# EAGLE board piskac_pan (EAGLE 7.2.0)
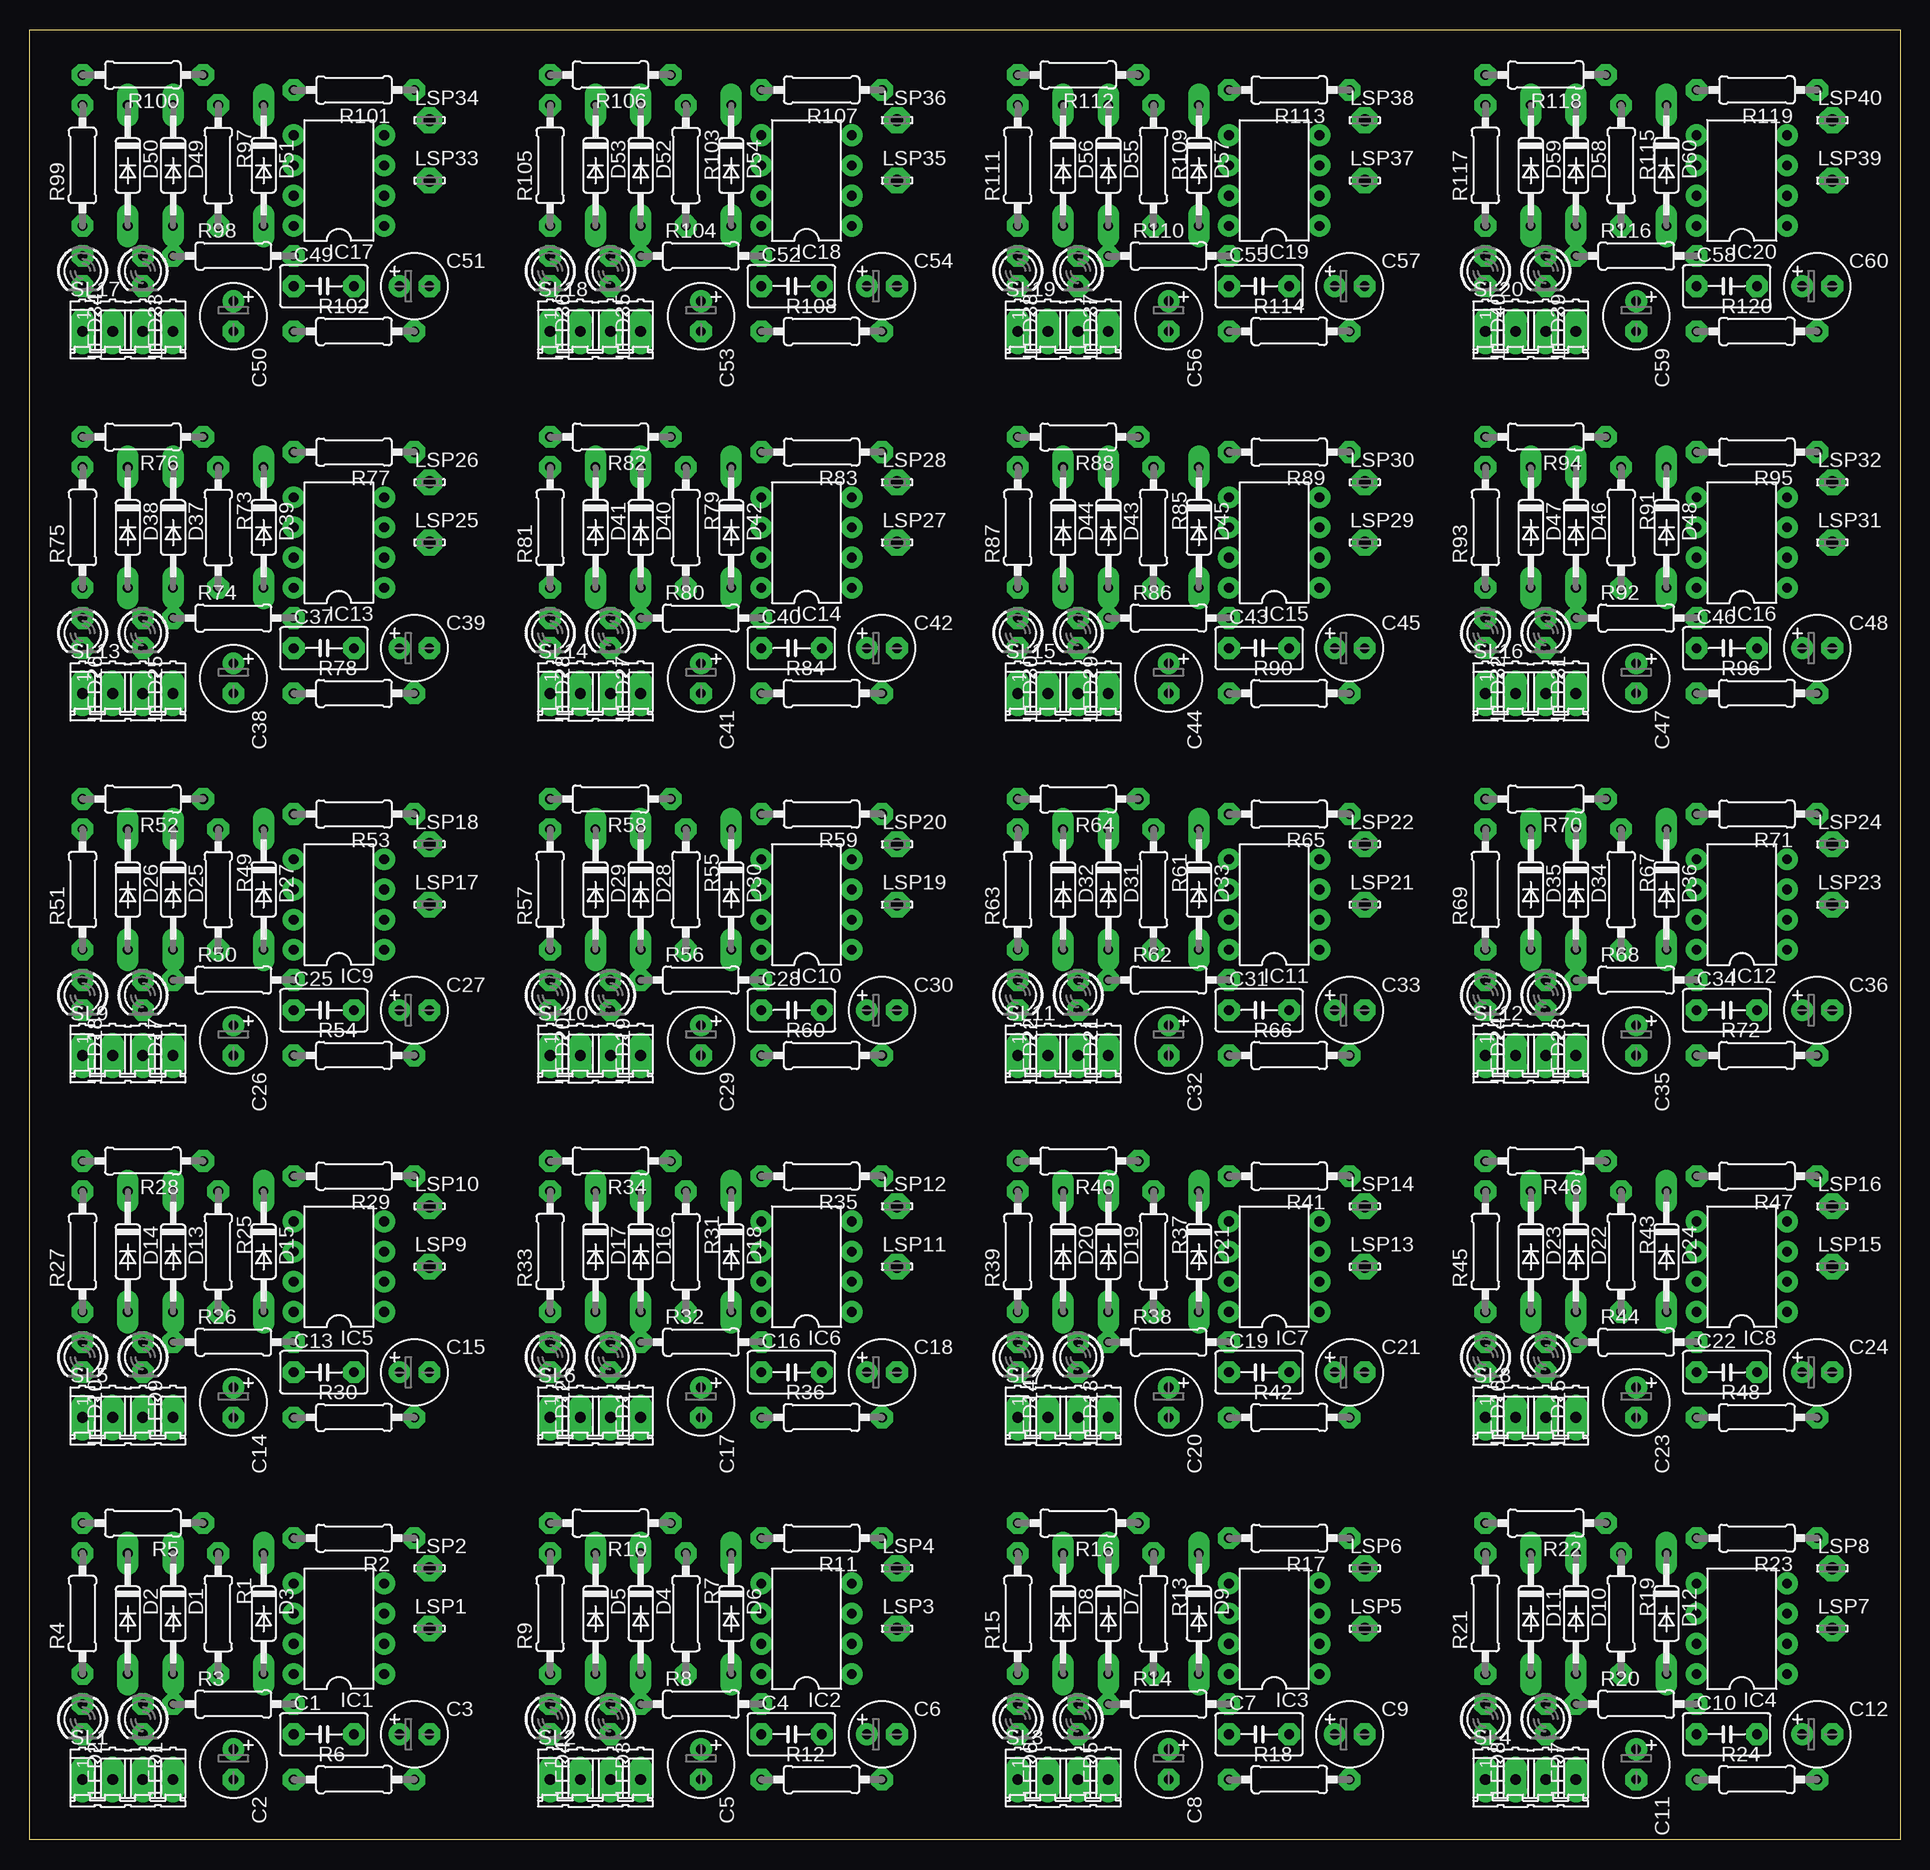
[diagram p0: board, top side]
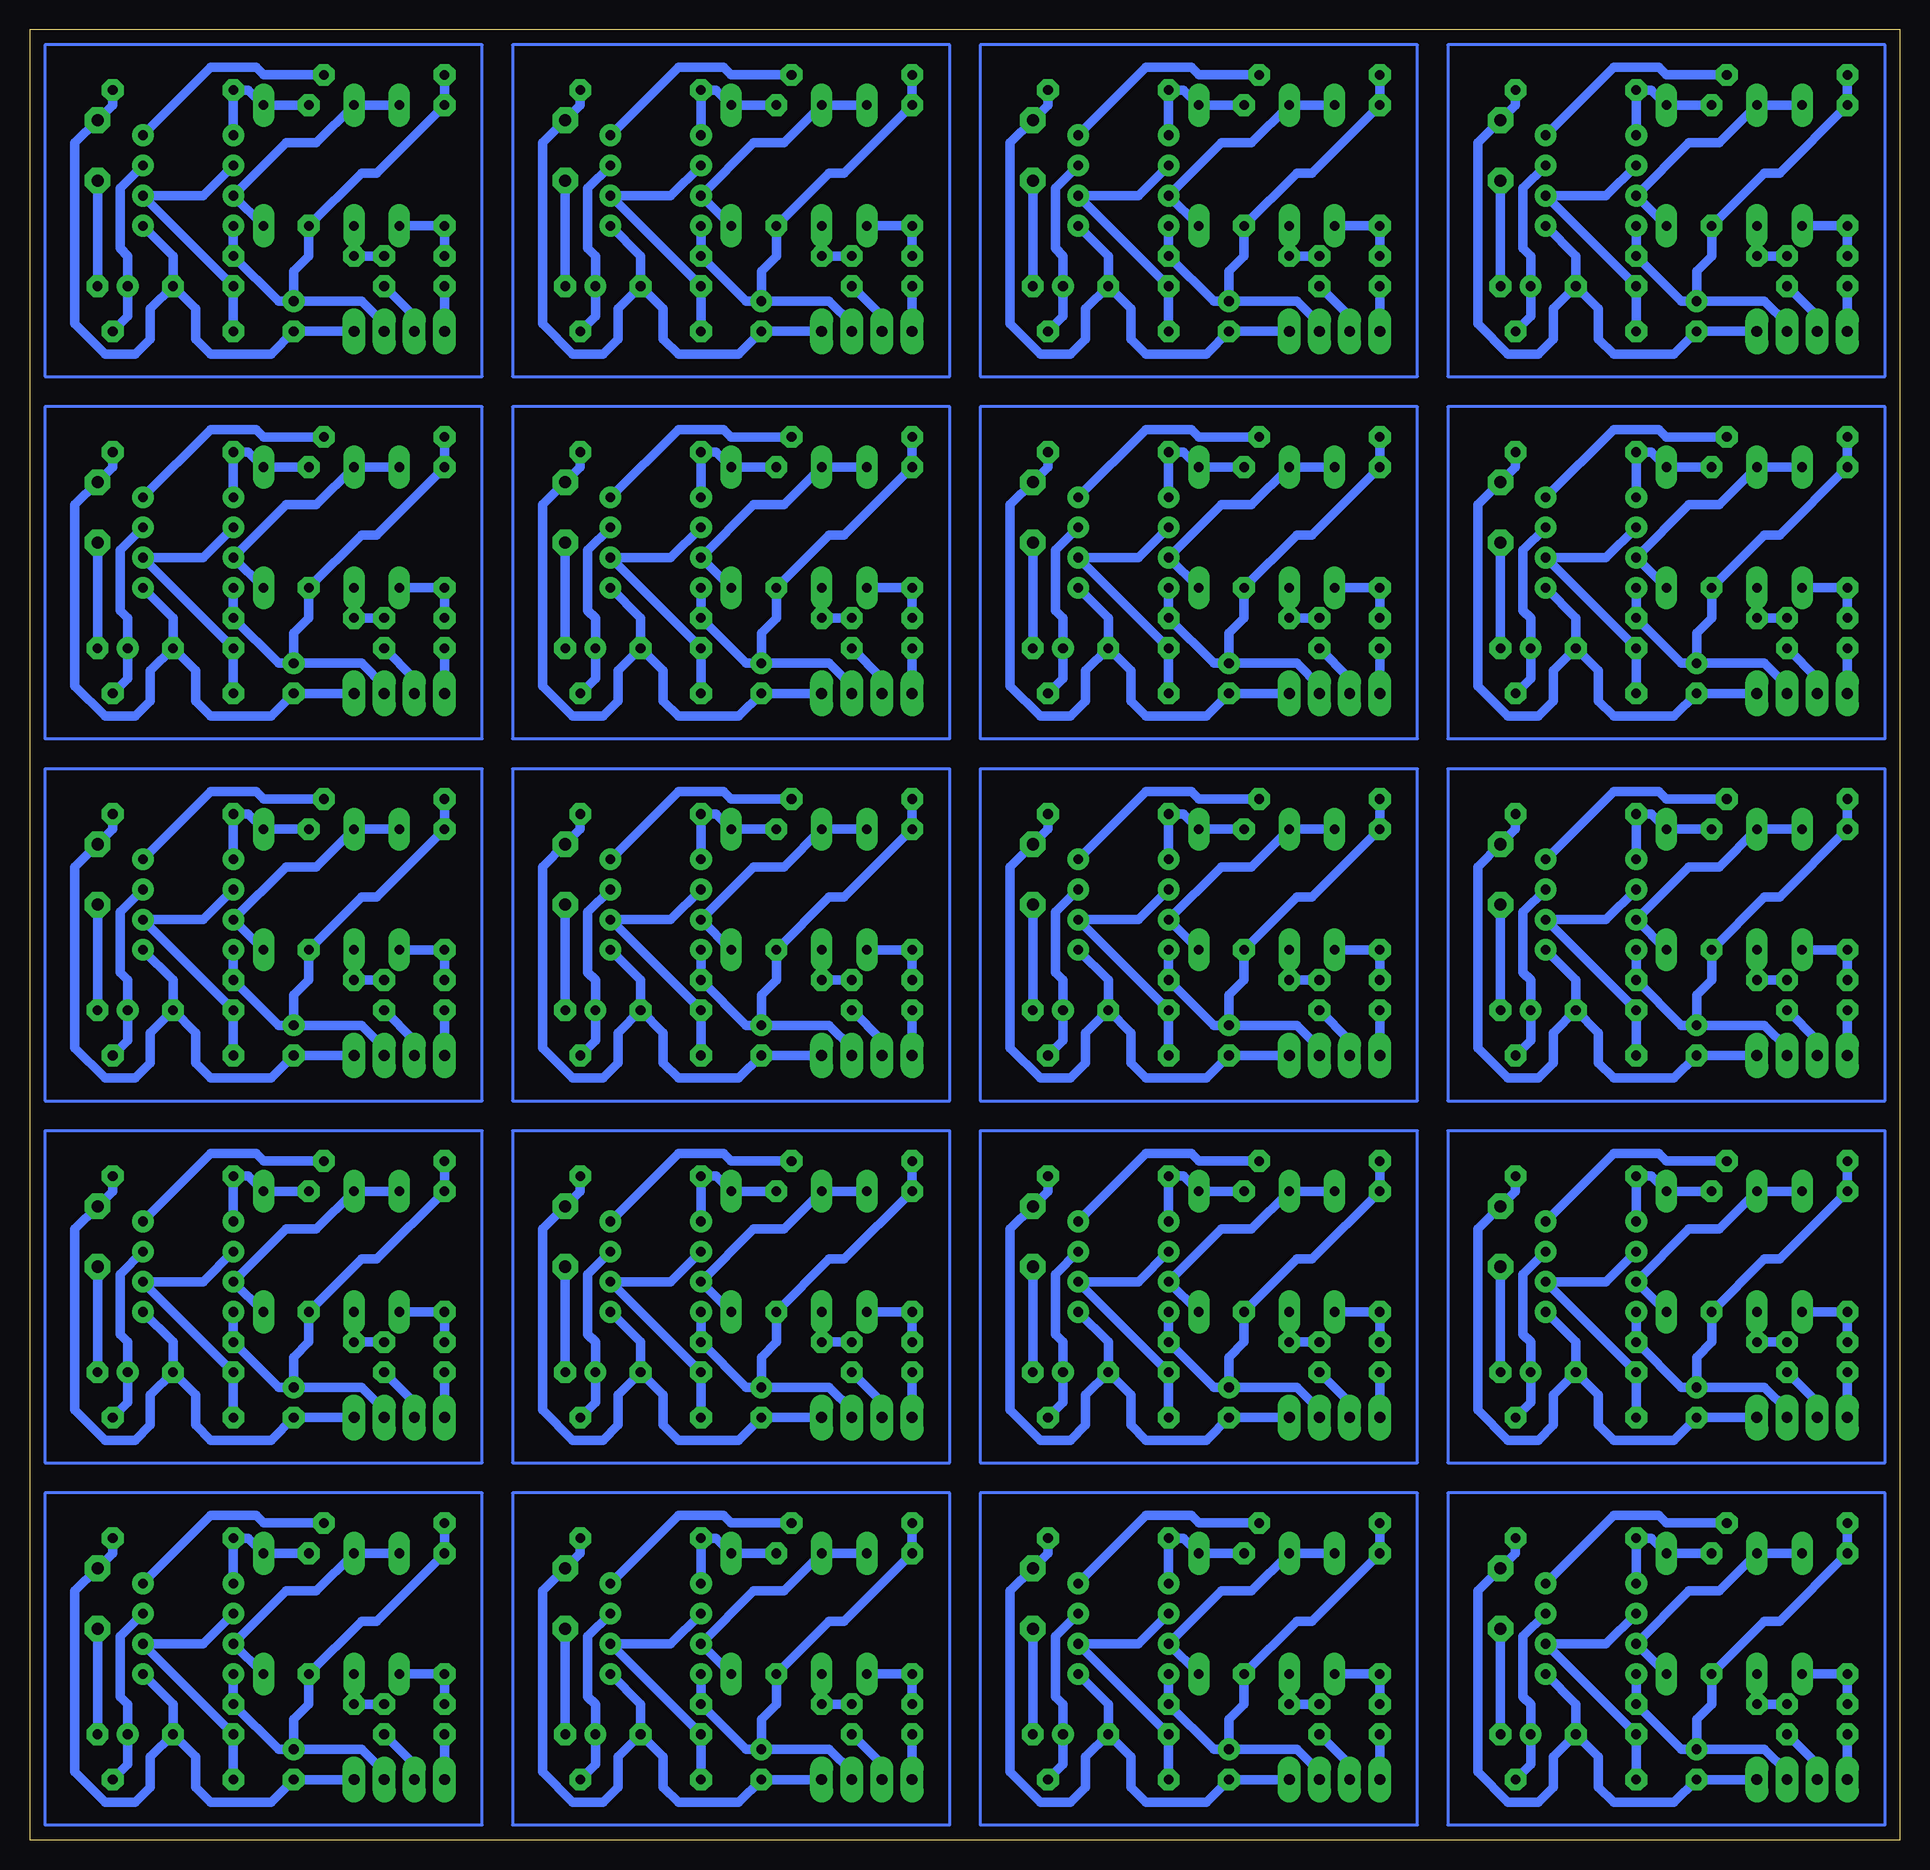
[diagram p1: board, bottom side, seen from below]

Size 157.48 x 152.4 mm. Coordinates in mm from the lower left corner, seen from the top.
Outline: 0,0 0,152.4 157.48,152.4 157.48,0 0,0
Copper layers (1*16): Top 0.035mm / dielectric 1.5mm / Bottom 0.035mm
Design rules "designRules": minimum track width 10mil, minimum drill 24mil, track to track 8mil, track to pad 8mil, pad to pad 8mil, via to via 8mil, smd to smd 8mil, copper to edge 20mil, drill to drill 8mil, minimum pad ring 20mil, minimum via ring 8mil, stop-mask expansion 4mil, vias tented up to drill 0mil, thermal gap 10mil

## Footprints (pad centres in the part's own frame; a part is rotated, then mirrored left to right if it is on the bottom)
C5B3.5 = drill 0.813 pad 1.6 octagon: 1 -2.54,0; 2 2.54,0
E2,5-6 = drill 0.813 pad 1.6: + -1.27,0 | drill 0.813 pad 1.6 octagon: - 1.27,0
DO35-10 = drill 0.813 long: A 5.08,0; C -5.08,0
DIL08 = drill 0.813 pad 1.27: 1 -3.81,-3.81; 2 -1.27,-3.81; 3 1.27,-3.81; 4 3.81,-3.81; 5 3.81,3.81; 6 1.27,3.81; 7 -1.27,3.81; 8 -3.81,3.81
LED3MM = drill 0.813 octagon: A -1.27,0; K 1.27,0
LSP10 = drill 1.016 pad 2.159 octagon: MP 0,0
0207/10 = drill 0.813 octagon: 1 -5.08,0; 2 5.08,0
04P = drill 0.914 long: 1 -3.81,0; 2 -1.27,0; 3 1.27,0; 4 3.81,0

## Placement (x,y rotation side)
C1  12n  [C5B3.5]  24.77,8.89 0 top
C2  10u  [E2,5-6]  17.14,6.35 270 top
C3  10u  [E2,5-6]  32.38,8.89 0 top
C4  12n  [C5B3.5]  64.14,8.89 0 top
C5  10u  [E2,5-6]  56.52,6.35 270 top
C6  10u  [E2,5-6]  71.75,8.89 0 top
C7  12n  [C5B3.5]  103.5,8.89 0 top
C8  10u  [E2,5-6]  95.88,6.35 270 top
C9  10u  [E2,5-6]  111.12,8.89 0 top
C10  12n  [C5B3.5]  142.88,8.89 0 top
C11  10u  [E2,5-6]  135.26,6.35 270 top
C12  10u  [E2,5-6]  150.5,8.89 0 top
C13  12n  [C5B3.5]  24.77,39.37 0 top
C14  10u  [E2,5-6]  17.14,36.83 270 top
C15  10u  [E2,5-6]  32.38,39.37 0 top
C16  12n  [C5B3.5]  64.14,39.37 0 top
C17  10u  [E2,5-6]  56.52,36.83 270 top
C18  10u  [E2,5-6]  71.75,39.37 0 top
C19  12n  [C5B3.5]  103.5,39.37 0 top
C20  10u  [E2,5-6]  95.88,36.83 270 top
C21  10u  [E2,5-6]  111.12,39.37 0 top
C22  12n  [C5B3.5]  142.88,39.37 0 top
C23  10u  [E2,5-6]  135.26,36.83 270 top
C24  10u  [E2,5-6]  150.5,39.37 0 top
C25  12n  [C5B3.5]  24.77,69.85 0 top
C26  10u  [E2,5-6]  17.14,67.31 270 top
C27  10u  [E2,5-6]  32.38,69.85 0 top
C28  12n  [C5B3.5]  64.14,69.85 0 top
C29  10u  [E2,5-6]  56.52,67.31 270 top
C30  10u  [E2,5-6]  71.75,69.85 0 top
C31  12n  [C5B3.5]  103.5,69.85 0 top
C32  10u  [E2,5-6]  95.88,67.31 270 top
C33  10u  [E2,5-6]  111.12,69.85 0 top
C34  12n  [C5B3.5]  142.88,69.85 0 top
C35  10u  [E2,5-6]  135.26,67.31 270 top
C36  10u  [E2,5-6]  150.5,69.85 0 top
C37  12n  [C5B3.5]  24.77,100.33 0 top
C38  10u  [E2,5-6]  17.14,97.79 270 top
C39  10u  [E2,5-6]  32.38,100.33 0 top
C40  12n  [C5B3.5]  64.14,100.33 0 top
C41  10u  [E2,5-6]  56.52,97.79 270 top
C42  10u  [E2,5-6]  71.75,100.33 0 top
C43  12n  [C5B3.5]  103.5,100.33 0 top
C44  10u  [E2,5-6]  95.88,97.79 270 top
C45  10u  [E2,5-6]  111.12,100.33 0 top
C46  12n  [C5B3.5]  142.88,100.33 0 top
C47  10u  [E2,5-6]  135.26,97.79 270 top
C48  10u  [E2,5-6]  150.5,100.33 0 top
C49  12n  [C5B3.5]  24.77,130.81 0 top
C50  10u  [E2,5-6]  17.14,128.27 270 top
C51  10u  [E2,5-6]  32.38,130.81 0 top
C52  12n  [C5B3.5]  64.14,130.81 0 top
C53  10u  [E2,5-6]  56.52,128.27 270 top
C54  10u  [E2,5-6]  71.75,130.81 0 top
C55  12n  [C5B3.5]  103.5,130.81 0 top
C56  10u  [E2,5-6]  95.88,128.27 270 top
C57  10u  [E2,5-6]  111.12,130.81 0 top
C58  12n  [C5B3.5]  142.88,130.81 0 top
C59  10u  [E2,5-6]  135.26,128.27 270 top
C60  10u  [E2,5-6]  150.5,130.81 0 top
D1  1N4148  [DO35-10]  12.06,19.05 270 top
D2  1N4148  [DO35-10]  8.26,19.05 270 top
D3  1N4148  [DO35-10]  19.68,19.05 270 top
D4  1N4148  [DO35-10]  51.44,19.05 270 top
D5  1N4148  [DO35-10]  47.62,19.05 270 top
D6  1N4148  [DO35-10]  59.05,19.05 270 top
D7  1N4148  [DO35-10]  90.8,19.05 270 top
D8  1N4148  [DO35-10]  86.99,19.05 270 top
D9  1N4148  [DO35-10]  98.42,19.05 270 top
D10  1N4148  [DO35-10]  130.18,19.05 270 top
D11  1N4148  [DO35-10]  126.36,19.05 270 top
D12  1N4148  [DO35-10]  137.8,19.05 270 top
D13  1N4148  [DO35-10]  12.06,49.53 270 top
D14  1N4148  [DO35-10]  8.26,49.53 270 top
D15  1N4148  [DO35-10]  19.68,49.53 270 top
D16  1N4148  [DO35-10]  51.44,49.53 270 top
D17  1N4148  [DO35-10]  47.62,49.53 270 top
D18  1N4148  [DO35-10]  59.05,49.53 270 top
D19  1N4148  [DO35-10]  90.8,49.53 270 top
D20  1N4148  [DO35-10]  86.99,49.53 270 top
D21  1N4148  [DO35-10]  98.42,49.53 270 top
D22  1N4148  [DO35-10]  130.18,49.53 270 top
D23  1N4148  [DO35-10]  126.36,49.53 270 top
D24  1N4148  [DO35-10]  137.8,49.53 270 top
D25  1N4148  [DO35-10]  12.06,80.01 270 top
D26  1N4148  [DO35-10]  8.26,80.01 270 top
D27  1N4148  [DO35-10]  19.68,80.01 270 top
D28  1N4148  [DO35-10]  51.44,80.01 270 top
D29  1N4148  [DO35-10]  47.62,80.01 270 top
D30  1N4148  [DO35-10]  59.05,80.01 270 top
D31  1N4148  [DO35-10]  90.8,80.01 270 top
D32  1N4148  [DO35-10]  86.99,80.01 270 top
D33  1N4148  [DO35-10]  98.42,80.01 270 top
D34  1N4148  [DO35-10]  130.18,80.01 270 top
D35  1N4148  [DO35-10]  126.36,80.01 270 top
D36  1N4148  [DO35-10]  137.8,80.01 270 top
D37  1N4148  [DO35-10]  12.06,110.49 270 top
D38  1N4148  [DO35-10]  8.26,110.49 270 top
D39  1N4148  [DO35-10]  19.68,110.49 270 top
D40  1N4148  [DO35-10]  51.44,110.49 270 top
D41  1N4148  [DO35-10]  47.62,110.49 270 top
D42  1N4148  [DO35-10]  59.05,110.49 270 top
D43  1N4148  [DO35-10]  90.8,110.49 270 top
D44  1N4148  [DO35-10]  86.99,110.49 270 top
D45  1N4148  [DO35-10]  98.42,110.49 270 top
D46  1N4148  [DO35-10]  130.18,110.49 270 top
D47  1N4148  [DO35-10]  126.36,110.49 270 top
D48  1N4148  [DO35-10]  137.8,110.49 270 top
D49  1N4148  [DO35-10]  12.06,140.97 270 top
D50  1N4148  [DO35-10]  8.26,140.97 270 top
D51  1N4148  [DO35-10]  19.68,140.97 270 top
D52  1N4148  [DO35-10]  51.44,140.97 270 top
D53  1N4148  [DO35-10]  47.62,140.97 270 top
D54  1N4148  [DO35-10]  59.05,140.97 270 top
D55  1N4148  [DO35-10]  90.8,140.97 270 top
D56  1N4148  [DO35-10]  86.99,140.97 270 top
D57  1N4148  [DO35-10]  98.42,140.97 270 top
D58  1N4148  [DO35-10]  130.18,140.97 270 top
D59  1N4148  [DO35-10]  126.36,140.97 270 top
D60  1N4148  [DO35-10]  137.8,140.97 270 top
DRILEGEND  [DRILEGEND]  0,-3.81 0 top  (outside the outline)
IC1  NE555N  [DIL08]  26.04,17.78 90 top
IC2  NE555N  [DIL08]  65.41,17.78 90 top
IC3  NE555N  [DIL08]  104.77,17.78 90 top
IC4  NE555N  [DIL08]  144.15,17.78 90 top
IC5  NE555N  [DIL08]  26.04,48.26 90 top
IC6  NE555N  [DIL08]  65.41,48.26 90 top
IC7  NE555N  [DIL08]  104.77,48.26 90 top
IC8  NE555N  [DIL08]  144.15,48.26 90 top
IC9  NE555N  [DIL08]  26.04,78.74 90 top
IC10  NE555N  [DIL08]  65.41,78.74 90 top
IC11  NE555N  [DIL08]  104.77,78.74 90 top
IC12  NE555N  [DIL08]  144.15,78.74 90 top
IC13  NE555N  [DIL08]  26.04,109.22 90 top
IC14  NE555N  [DIL08]  65.41,109.22 90 top
IC15  NE555N  [DIL08]  104.77,109.22 90 top
IC16  NE555N  [DIL08]  144.15,109.22 90 top
IC17  NE555N  [DIL08]  26.04,139.7 90 top
IC18  NE555N  [DIL08]  65.41,139.7 90 top
IC19  NE555N  [DIL08]  104.77,139.7 90 top
IC20  NE555N  [DIL08]  144.15,139.7 90 top
LED1  RED  [LED3MM]  9.53,10.16 270 top
LED2  GREEN  [LED3MM]  4.45,10.16 270 top
LED3  RED  [LED3MM]  48.9,10.16 270 top
LED4  GREEN  [LED3MM]  43.82,10.16 270 top
LED5  RED  [LED3MM]  88.27,10.16 270 top
LED6  GREEN  [LED3MM]  83.19,10.16 270 top
LED7  RED  [LED3MM]  127.63,10.16 270 top
LED8  GREEN  [LED3MM]  122.55,10.16 270 top
LED9  RED  [LED3MM]  9.53,40.64 270 top
LED10  GREEN  [LED3MM]  4.45,40.64 270 top
LED11  RED  [LED3MM]  48.9,40.64 270 top
LED12  GREEN  [LED3MM]  43.82,40.64 270 top
LED13  RED  [LED3MM]  88.27,40.64 270 top
LED14  GREEN  [LED3MM]  83.19,40.64 270 top
LED15  RED  [LED3MM]  127.63,40.64 270 top
LED16  GREEN  [LED3MM]  122.55,40.64 270 top
LED17  RED  [LED3MM]  9.53,71.12 270 top
LED18  GREEN  [LED3MM]  4.45,71.12 270 top
LED19  RED  [LED3MM]  48.9,71.12 270 top
LED20  GREEN  [LED3MM]  43.82,71.12 270 top
LED21  RED  [LED3MM]  88.27,71.12 270 top
LED22  GREEN  [LED3MM]  83.19,71.12 270 top
LED23  RED  [LED3MM]  127.63,71.12 270 top
LED24  GREEN  [LED3MM]  122.55,71.12 270 top
LED25  RED  [LED3MM]  9.53,101.6 270 top
LED26  GREEN  [LED3MM]  4.45,101.6 270 top
LED27  RED  [LED3MM]  48.9,101.6 270 top
LED28  GREEN  [LED3MM]  43.82,101.6 270 top
LED29  RED  [LED3MM]  88.27,101.6 270 top
LED30  GREEN  [LED3MM]  83.19,101.6 270 top
LED31  RED  [LED3MM]  127.63,101.6 270 top
LED32  GREEN  [LED3MM]  122.55,101.6 270 top
LED33  RED  [LED3MM]  9.53,132.08 270 top
LED34  GREEN  [LED3MM]  4.45,132.08 270 top
LED35  RED  [LED3MM]  48.9,132.08 270 top
LED36  GREEN  [LED3MM]  43.82,132.08 270 top
LED37  RED  [LED3MM]  88.27,132.08 270 top
LED38  GREEN  [LED3MM]  83.19,132.08 270 top
LED39  RED  [LED3MM]  127.63,132.08 270 top
LED40  GREEN  [LED3MM]  122.55,132.08 270 top
LSP1  LSP10  [LSP10]  33.66,17.78 0 top
LSP2  LSP10  [LSP10]  33.66,22.86 0 top
LSP3  LSP10  [LSP10]  73.02,17.78 0 top
LSP4  LSP10  [LSP10]  73.02,22.86 0 top
LSP5  LSP10  [LSP10]  112.39,17.78 0 top
LSP6  LSP10  [LSP10]  112.39,22.86 0 top
LSP7  LSP10  [LSP10]  151.77,17.78 0 top
LSP8  LSP10  [LSP10]  151.77,22.86 0 top
LSP9  LSP10  [LSP10]  33.66,48.26 0 top
LSP10  LSP10  [LSP10]  33.66,53.34 0 top
LSP11  LSP10  [LSP10]  73.02,48.26 0 top
LSP12  LSP10  [LSP10]  73.02,53.34 0 top
LSP13  LSP10  [LSP10]  112.39,48.26 0 top
LSP14  LSP10  [LSP10]  112.39,53.34 0 top
LSP15  LSP10  [LSP10]  151.77,48.26 0 top
LSP16  LSP10  [LSP10]  151.77,53.34 0 top
LSP17  LSP10  [LSP10]  33.66,78.74 0 top
LSP18  LSP10  [LSP10]  33.66,83.82 0 top
LSP19  LSP10  [LSP10]  73.02,78.74 0 top
LSP20  LSP10  [LSP10]  73.02,83.82 0 top
LSP21  LSP10  [LSP10]  112.39,78.74 0 top
LSP22  LSP10  [LSP10]  112.39,83.82 0 top
LSP23  LSP10  [LSP10]  151.77,78.74 0 top
LSP24  LSP10  [LSP10]  151.77,83.82 0 top
LSP25  LSP10  [LSP10]  33.66,109.22 0 top
LSP26  LSP10  [LSP10]  33.66,114.3 0 top
LSP27  LSP10  [LSP10]  73.02,109.22 0 top
LSP28  LSP10  [LSP10]  73.02,114.3 0 top
LSP29  LSP10  [LSP10]  112.39,109.22 0 top
LSP30  LSP10  [LSP10]  112.39,114.3 0 top
LSP31  LSP10  [LSP10]  151.77,109.22 0 top
LSP32  LSP10  [LSP10]  151.77,114.3 0 top
LSP33  LSP10  [LSP10]  33.66,139.7 0 top
LSP34  LSP10  [LSP10]  33.66,144.78 0 top
LSP35  LSP10  [LSP10]  73.02,139.7 0 top
LSP36  LSP10  [LSP10]  73.02,144.78 0 top
LSP37  LSP10  [LSP10]  112.39,139.7 0 top
LSP38  LSP10  [LSP10]  112.39,144.78 0 top
LSP39  LSP10  [LSP10]  151.77,139.7 0 top
LSP40  LSP10  [LSP10]  151.77,144.78 0 top
R1  750R  [0207/10]  15.88,19.05 270 top
R2  1k5  [0207/10]  27.3,25.4 180 top
R3  3k3  [0207/10]  17.14,11.43 0 top
R4  1k5  [0207/10]  4.45,19.05 90 top
R5  3k3  [0207/10]  9.53,26.67 180 top
R6  110k  [0207/10]  27.3,5.08 0 top
R7  750R  [0207/10]  55.25,19.05 270 top
R8  3k3  [0207/10]  56.52,11.43 0 top
R9  1k5  [0207/10]  43.82,19.05 90 top
R10  3k3  [0207/10]  48.9,26.67 180 top
R11  1k5  [0207/10]  66.67,25.4 180 top
R12  110k  [0207/10]  66.67,5.08 0 top
R13  750R  [0207/10]  94.61,19.05 270 top
R14  3k3  [0207/10]  95.88,11.43 0 top
R15  1k5  [0207/10]  83.19,19.05 90 top
R16  3k3  [0207/10]  88.27,26.67 180 top
R17  1k5  [0207/10]  106.05,25.4 180 top
R18  110k  [0207/10]  106.05,5.08 0 top
R19  750R  [0207/10]  133.99,19.05 270 top
R20  3k3  [0207/10]  135.26,11.43 0 top
R21  1k5  [0207/10]  122.55,19.05 90 top
R22  3k3  [0207/10]  127.63,26.67 180 top
R23  1k5  [0207/10]  145.42,25.4 180 top
R24  110k  [0207/10]  145.42,5.08 0 top
R25  750R  [0207/10]  15.88,49.53 270 top
R26  3k3  [0207/10]  17.14,41.91 0 top
R27  1k5  [0207/10]  4.45,49.53 90 top
R28  3k3  [0207/10]  9.53,57.15 180 top
R29  1k5  [0207/10]  27.3,55.88 180 top
R30  110k  [0207/10]  27.3,35.56 0 top
R31  750R  [0207/10]  55.25,49.53 270 top
R32  3k3  [0207/10]  56.52,41.91 0 top
R33  1k5  [0207/10]  43.82,49.53 90 top
R34  3k3  [0207/10]  48.9,57.15 180 top
R35  1k5  [0207/10]  66.67,55.88 180 top
R36  110k  [0207/10]  66.67,35.56 0 top
R37  750R  [0207/10]  94.61,49.53 270 top
R38  3k3  [0207/10]  95.88,41.91 0 top
R39  1k5  [0207/10]  83.19,49.53 90 top
R40  3k3  [0207/10]  88.27,57.15 180 top
R41  1k5  [0207/10]  106.05,55.88 180 top
R42  110k  [0207/10]  106.05,35.56 0 top
R43  750R  [0207/10]  133.99,49.53 270 top
R44  3k3  [0207/10]  135.26,41.91 0 top
R45  1k5  [0207/10]  122.55,49.53 90 top
R46  3k3  [0207/10]  127.63,57.15 180 top
R47  1k5  [0207/10]  145.42,55.88 180 top
R48  110k  [0207/10]  145.42,35.56 0 top
R49  750R  [0207/10]  15.88,80.01 270 top
R50  3k3  [0207/10]  17.14,72.39 0 top
R51  1k5  [0207/10]  4.45,80.01 90 top
R52  3k3  [0207/10]  9.53,87.63 180 top
R53  1k5  [0207/10]  27.3,86.36 180 top
R54  110k  [0207/10]  27.3,66.04 0 top
R55  750R  [0207/10]  55.25,80.01 270 top
R56  3k3  [0207/10]  56.52,72.39 0 top
R57  1k5  [0207/10]  43.82,80.01 90 top
R58  3k3  [0207/10]  48.9,87.63 180 top
R59  1k5  [0207/10]  66.67,86.36 180 top
R60  110k  [0207/10]  66.67,66.04 0 top
R61  750R  [0207/10]  94.61,80.01 270 top
R62  3k3  [0207/10]  95.88,72.39 0 top
R63  1k5  [0207/10]  83.19,80.01 90 top
R64  3k3  [0207/10]  88.27,87.63 180 top
R65  1k5  [0207/10]  106.05,86.36 180 top
R66  110k  [0207/10]  106.05,66.04 0 top
R67  750R  [0207/10]  133.99,80.01 270 top
R68  3k3  [0207/10]  135.26,72.39 0 top
R69  1k5  [0207/10]  122.55,80.01 90 top
R70  3k3  [0207/10]  127.63,87.63 180 top
R71  1k5  [0207/10]  145.42,86.36 180 top
R72  110k  [0207/10]  145.42,66.04 0 top
R73  750R  [0207/10]  15.88,110.49 270 top
R74  3k3  [0207/10]  17.14,102.87 0 top
R75  1k5  [0207/10]  4.45,110.49 90 top
R76  3k3  [0207/10]  9.53,118.11 180 top
R77  1k5  [0207/10]  27.3,116.84 180 top
R78  110k  [0207/10]  27.3,96.52 0 top
R79  750R  [0207/10]  55.25,110.49 270 top
R80  3k3  [0207/10]  56.52,102.87 0 top
R81  1k5  [0207/10]  43.82,110.49 90 top
R82  3k3  [0207/10]  48.9,118.11 180 top
R83  1k5  [0207/10]  66.67,116.84 180 top
R84  110k  [0207/10]  66.67,96.52 0 top
R85  750R  [0207/10]  94.61,110.49 270 top
R86  3k3  [0207/10]  95.88,102.87 0 top
R87  1k5  [0207/10]  83.19,110.49 90 top
R88  3k3  [0207/10]  88.27,118.11 180 top
R89  1k5  [0207/10]  106.05,116.84 180 top
R90  110k  [0207/10]  106.05,96.52 0 top
R91  750R  [0207/10]  133.99,110.49 270 top
R92  3k3  [0207/10]  135.26,102.87 0 top
R93  1k5  [0207/10]  122.55,110.49 90 top
R94  3k3  [0207/10]  127.63,118.11 180 top
R95  1k5  [0207/10]  145.42,116.84 180 top
R96  110k  [0207/10]  145.42,96.52 0 top
R97  750R  [0207/10]  15.88,140.97 270 top
R98  3k3  [0207/10]  17.14,133.35 0 top
R99  1k5  [0207/10]  4.45,140.97 90 top
R100  3k3  [0207/10]  9.53,148.59 180 top
R101  1k5  [0207/10]  27.3,147.32 180 top
R102  110k  [0207/10]  27.3,127 0 top
R103  750R  [0207/10]  55.25,140.97 270 top
R104  3k3  [0207/10]  56.52,133.35 0 top
R105  1k5  [0207/10]  43.82,140.97 90 top
R106  3k3  [0207/10]  48.9,148.59 180 top
R107  1k5  [0207/10]  66.67,147.32 180 top
R108  110k  [0207/10]  66.67,127 0 top
R109  750R  [0207/10]  94.61,140.97 270 top
R110  3k3  [0207/10]  95.88,133.35 0 top
R111  1k5  [0207/10]  83.19,140.97 90 top
R112  3k3  [0207/10]  88.27,148.59 180 top
R113  1k5  [0207/10]  106.05,147.32 180 top
R114  110k  [0207/10]  106.05,127 0 top
R115  750R  [0207/10]  133.99,140.97 270 top
R116  3k3  [0207/10]  135.26,133.35 0 top
R117  1k5  [0207/10]  122.55,140.97 90 top
R118  3k3  [0207/10]  127.63,148.59 180 top
R119  1k5  [0207/10]  145.42,147.32 180 top
R120  110k  [0207/10]  145.42,127 0 top
SL1  [04P]  8.26,5.08 0 top
SL2  [04P]  47.62,5.08 0 top
SL3  [04P]  86.99,5.08 0 top
SL4  [04P]  126.36,5.08 0 top
SL5  [04P]  8.26,35.56 0 top
SL6  [04P]  47.62,35.56 0 top
SL7  [04P]  86.99,35.56 0 top
SL8  [04P]  126.36,35.56 0 top
SL9  [04P]  8.26,66.04 0 top
SL10  [04P]  47.62,66.04 0 top
SL11  [04P]  86.99,66.04 0 top
SL12  [04P]  126.36,66.04 0 top
SL13  [04P]  8.26,96.52 0 top
SL14  [04P]  47.62,96.52 0 top
SL15  [04P]  86.99,96.52 0 top
SL16  [04P]  126.36,96.52 0 top
SL17  [04P]  8.26,127 0 top
SL18  [04P]  47.62,127 0 top
SL19  [04P]  86.99,127 0 top
SL20  [04P]  126.36,127 0 top

## Library data of the parts
C1 C4 C7 C10 C13 C16 C19 C22 C25 C28 C31 C34 C37 C40 C43 C46 C49 C52 C55 C58 = capacitor-wima
C2 C3 C5 C6 C8 C9 C11 C12 C14 C15 C17 C18 C20 C21 C23 C24 C26 C27 C29 C30 C32 C33 C35 C36 C38 C39 C41 C42 C44 C45 C47 C48 C50 C51 C53 C54 C56 C57 C59 C60 R1-R120 = rcl
D1-D60 = diode
DRILEGEND = drilegend
IC1-IC20 = linear
LED1-LED40 = led
LSP1-LSP40 = solpad
SL1-SL20 = con-amp-quick; OC_FARNELL: unknown; OC_NEWARK: unknown

## Nets
+12V: C2.+ IC1.8 R1.2 R3.2 R4.2 R5.2 SL1.3
+12V1: C5.+ IC2.8 R7.2 R8.2 R9.2 R10.2 SL2.3
+12V2: C8.+ IC3.8 R13.2 R14.2 R15.2 R16.2 SL3.3
+12V3: C11.+ IC4.8 R19.2 R20.2 R21.2 R22.2 SL4.3
+12V4: C14.+ IC5.8 R25.2 R26.2 R27.2 R28.2 SL5.3
+12V5: C17.+ IC6.8 R31.2 R32.2 R33.2 R34.2 SL6.3
+12V6: C20.+ IC7.8 R37.2 R38.2 R39.2 R40.2 SL7.3
+12V7: C23.+ IC8.8 R43.2 R44.2 R45.2 R46.2 SL8.3
+12V8: C26.+ IC9.8 R49.2 R50.2 R51.2 R52.2 SL9.3
+12V9: C29.+ IC10.8 R55.2 R56.2 R57.2 R58.2 SL10.3
+12V10: C32.+ IC11.8 R61.2 R62.2 R63.2 R64.2 SL11.3
+12V11: C35.+ IC12.8 R67.2 R68.2 R69.2 R70.2 SL12.3
+12V12: C38.+ IC13.8 R73.2 R74.2 R75.2 R76.2 SL13.3
+12V13: C41.+ IC14.8 R79.2 R80.2 R81.2 R82.2 SL14.3
+12V14: C44.+ IC15.8 R85.2 R86.2 R87.2 R88.2 SL15.3
+12V15: C47.+ IC16.8 R91.2 R92.2 R93.2 R94.2 SL16.3
+12V16: C50.+ IC17.8 R97.2 R98.2 R99.2 R100.2 SL17.3
+12V17: C53.+ IC18.8 R103.2 R104.2 R105.2 R106.2 SL18.3
+12V18: C56.+ IC19.8 R109.2 R110.2 R111.2 R112.2 SL19.3
+12V19: C59.+ IC20.8 R115.2 R116.2 R117.2 R118.2 SL20.3
GND: C1.2 C2.- IC1.1 LSP2.MP R2.1 SL1.4
GND1: C4.2 C5.- IC2.1 LSP4.MP R11.1 SL2.4
GND2: C7.2 C8.- IC3.1 LSP6.MP R17.1 SL3.4
GND3: C10.2 C11.- IC4.1 LSP8.MP R23.1 SL4.4
GND4: C13.2 C14.- IC5.1 LSP10.MP R29.1 SL5.4
GND5: C16.2 C17.- IC6.1 LSP12.MP R35.1 SL6.4
GND6: C19.2 C20.- IC7.1 LSP14.MP R41.1 SL7.4
GND7: C22.2 C23.- IC8.1 LSP16.MP R47.1 SL8.4
GND8: C25.2 C26.- IC9.1 LSP18.MP R53.1 SL9.4
GND9: C28.2 C29.- IC10.1 LSP20.MP R59.1 SL10.4
GND10: C31.2 C32.- IC11.1 LSP22.MP R65.1 SL11.4
GND11: C34.2 C35.- IC12.1 LSP24.MP R71.1 SL12.4
GND12: C37.2 C38.- IC13.1 LSP26.MP R77.1 SL13.4
GND13: C40.2 C41.- IC14.1 LSP28.MP R83.1 SL14.4
GND14: C43.2 C44.- IC15.1 LSP30.MP R89.1 SL15.4
GND15: C46.2 C47.- IC16.1 LSP32.MP R95.1 SL16.4
GND16: C49.2 C50.- IC17.1 LSP34.MP R101.1 SL17.4
GND17: C52.2 C53.- IC18.1 LSP36.MP R107.1 SL18.4
GND18: C55.2 C56.- IC19.1 LSP38.MP R113.1 SL19.4
GND19: C58.2 C59.- IC20.1 LSP40.MP R119.1 SL20.4
N$1: C1.1 IC1.2 IC1.6 R6.1
N$2: D3.C IC1.5 R1.1 R2.2
N$3: C3.- LSP1.MP
N$4: IC1.4 R5.1
N$5: D1.A LED1.A R3.1
N$6: LED1.K SL1.2
N$7: D2.A LED2.A R4.1
N$8: C3.+ IC1.3 R6.2
N$9: D1.C D2.C D3.A IC1.7
N$10: C6.+ IC2.3 R12.2
N$11: LED2.K SL1.1
N$12: LED3.K SL2.2
N$13: LED4.K SL2.1
N$14: C4.1 IC2.2 IC2.6 R12.1
N$15: D4.A LED3.A R8.1
N$16: D5.A LED4.A R9.1
N$17: IC2.4 R10.1
N$18: D6.C IC2.5 R7.1 R11.2
N$19: D4.C D5.C D6.A IC2.7
N$20: C6.- LSP3.MP
N$21: C9.+ IC3.3 R18.2
N$22: LED5.K SL3.2
N$23: LED6.K SL3.1
N$24: C7.1 IC3.2 IC3.6 R18.1
N$25: D7.A LED5.A R14.1
N$26: D8.A LED6.A R15.1
N$27: IC3.4 R16.1
N$28: D9.C IC3.5 R13.1 R17.2
N$29: D7.C D8.C D9.A IC3.7
N$30: C9.- LSP5.MP
N$31: C12.+ IC4.3 R24.2
N$32: LED7.K SL4.2
N$33: LED8.K SL4.1
N$34: C10.1 IC4.2 IC4.6 R24.1
N$35: D10.A LED7.A R20.1
N$36: D11.A LED8.A R21.1
N$37: IC4.4 R22.1
N$38: D12.C IC4.5 R19.1 R23.2
N$39: D10.C D11.C D12.A IC4.7
N$40: C12.- LSP7.MP
N$41: C15.+ IC5.3 R30.2
N$42: LED9.K SL5.2
N$43: LED10.K SL5.1
N$44: C13.1 IC5.2 IC5.6 R30.1
N$45: D13.A LED9.A R26.1
N$46: D14.A LED10.A R27.1
N$47: IC5.4 R28.1
N$48: D15.C IC5.5 R25.1 R29.2
N$49: D13.C D14.C D15.A IC5.7
N$50: C15.- LSP9.MP
N$51: C18.+ IC6.3 R36.2
N$52: LED11.K SL6.2
N$53: LED12.K SL6.1
N$54: C16.1 IC6.2 IC6.6 R36.1
N$55: D16.A LED11.A R32.1
N$56: D17.A LED12.A R33.1
N$57: IC6.4 R34.1
N$58: D18.C IC6.5 R31.1 R35.2
N$59: D16.C D17.C D18.A IC6.7
N$60: C18.- LSP11.MP
N$61: C21.+ IC7.3 R42.2
N$62: LED13.K SL7.2
N$63: LED14.K SL7.1
N$64: C19.1 IC7.2 IC7.6 R42.1
N$65: D19.A LED13.A R38.1
N$66: D20.A LED14.A R39.1
N$67: IC7.4 R40.1
N$68: D21.C IC7.5 R37.1 R41.2
N$69: D19.C D20.C D21.A IC7.7
N$70: C21.- LSP13.MP
N$71: C24.+ IC8.3 R48.2
N$72: LED15.K SL8.2
N$73: LED16.K SL8.1
N$74: C22.1 IC8.2 IC8.6 R48.1
N$75: D22.A LED15.A R44.1
N$76: D23.A LED16.A R45.1
N$77: IC8.4 R46.1
N$78: D24.C IC8.5 R43.1 R47.2
N$79: D22.C D23.C D24.A IC8.7
N$80: C24.- LSP15.MP
N$81: C27.+ IC9.3 R54.2
N$82: LED17.K SL9.2
N$83: LED18.K SL9.1
N$84: C25.1 IC9.2 IC9.6 R54.1
N$85: D25.A LED17.A R50.1
N$86: D26.A LED18.A R51.1
N$87: IC9.4 R52.1
N$88: D27.C IC9.5 R49.1 R53.2
N$89: D25.C D26.C D27.A IC9.7
N$90: C27.- LSP17.MP
N$91: C30.+ IC10.3 R60.2
N$92: LED19.K SL10.2
N$93: LED20.K SL10.1
N$94: C28.1 IC10.2 IC10.6 R60.1
N$95: D28.A LED19.A R56.1
N$96: D29.A LED20.A R57.1
N$97: IC10.4 R58.1
N$98: D30.C IC10.5 R55.1 R59.2
N$99: D28.C D29.C D30.A IC10.7
N$100: C30.- LSP19.MP
N$101: C33.+ IC11.3 R66.2
N$102: LED21.K SL11.2
N$103: LED22.K SL11.1
N$104: C31.1 IC11.2 IC11.6 R66.1
N$105: D31.A LED21.A R62.1
N$106: D32.A LED22.A R63.1
N$107: IC11.4 R64.1
N$108: D33.C IC11.5 R61.1 R65.2
N$109: D31.C D32.C D33.A IC11.7
N$110: C33.- LSP21.MP
N$111: C36.+ IC12.3 R72.2
N$112: LED23.K SL12.2
N$113: LED24.K SL12.1
N$114: C34.1 IC12.2 IC12.6 R72.1
N$115: D34.A LED23.A R68.1
N$116: D35.A LED24.A R69.1
N$117: IC12.4 R70.1
N$118: D36.C IC12.5 R67.1 R71.2
N$119: D34.C D35.C D36.A IC12.7
N$120: C36.- LSP23.MP
N$121: C39.+ IC13.3 R78.2
N$122: LED25.K SL13.2
N$123: LED26.K SL13.1
N$124: C37.1 IC13.2 IC13.6 R78.1
N$125: D37.A LED25.A R74.1
N$126: D38.A LED26.A R75.1
N$127: IC13.4 R76.1
N$128: D39.C IC13.5 R73.1 R77.2
N$129: D37.C D38.C D39.A IC13.7
N$130: C39.- LSP25.MP
N$131: C42.+ IC14.3 R84.2
N$132: LED27.K SL14.2
N$133: LED28.K SL14.1
N$134: C40.1 IC14.2 IC14.6 R84.1
N$135: D40.A LED27.A R80.1
N$136: D41.A LED28.A R81.1
N$137: IC14.4 R82.1
N$138: D42.C IC14.5 R79.1 R83.2
N$139: D40.C D41.C D42.A IC14.7
N$140: C42.- LSP27.MP
N$141: C45.+ IC15.3 R90.2
N$142: LED29.K SL15.2
N$143: LED30.K SL15.1
N$144: C43.1 IC15.2 IC15.6 R90.1
N$145: D43.A LED29.A R86.1
N$146: D44.A LED30.A R87.1
N$147: IC15.4 R88.1
N$148: D45.C IC15.5 R85.1 R89.2
N$149: D43.C D44.C D45.A IC15.7
N$150: C45.- LSP29.MP
N$151: C48.+ IC16.3 R96.2
N$152: LED31.K SL16.2
N$153: LED32.K SL16.1
N$154: C46.1 IC16.2 IC16.6 R96.1
N$155: D46.A LED31.A R92.1
N$156: D47.A LED32.A R93.1
N$157: IC16.4 R94.1
N$158: D48.C IC16.5 R91.1 R95.2
N$159: D46.C D47.C D48.A IC16.7
N$160: C48.- LSP31.MP
N$161: C51.+ IC17.3 R102.2
N$162: LED33.K SL17.2
N$163: LED34.K SL17.1
N$164: C49.1 IC17.2 IC17.6 R102.1
N$165: D49.A LED33.A R98.1
N$166: D50.A LED34.A R99.1
N$167: IC17.4 R100.1
N$168: D51.C IC17.5 R97.1 R101.2
N$169: D49.C D50.C D51.A IC17.7
N$170: C51.- LSP33.MP
N$171: C54.+ IC18.3 R108.2
N$172: LED35.K SL18.2
N$173: LED36.K SL18.1
N$174: C52.1 IC18.2 IC18.6 R108.1
N$175: D52.A LED35.A R104.1
N$176: D53.A LED36.A R105.1
N$177: IC18.4 R106.1
N$178: D54.C IC18.5 R103.1 R107.2
N$179: D52.C D53.C D54.A IC18.7
N$180: C54.- LSP35.MP
N$181: C57.+ IC19.3 R114.2
N$182: LED37.K SL19.2
N$183: LED38.K SL19.1
N$184: C55.1 IC19.2 IC19.6 R114.1
N$185: D55.A LED37.A R110.1
N$186: D56.A LED38.A R111.1
N$187: IC19.4 R112.1
N$188: D57.C IC19.5 R109.1 R113.2
N$189: D55.C D56.C D57.A IC19.7
N$190: C57.- LSP37.MP
N$191: C60.+ IC20.3 R120.2
N$192: LED39.K SL20.2
N$193: LED40.K SL20.1
N$194: C58.1 IC20.2 IC20.6 R120.1
N$195: D58.A LED39.A R116.1
N$196: D59.A LED40.A R117.1
N$197: IC20.4 R118.1
N$198: D60.C IC20.5 R115.1 R119.2
N$199: D58.C D59.C D60.A IC20.7
N$200: C60.- LSP39.MP

## Tracks (layer width: path | path; a pad name or v marks a point on that pad's centre or on a via)
+12V
  Bottom 0.813: C2.+ 17.14,10.16 15.88,11.43 R1.2 11.43,18.41 10.16,18.41 R4.2 R5.2 | C2.+ 11.43,7.62 9.53,5.71 SL1.3 | IC1.8 R3.2 18.41,7.62 C2.+
+12V1
  Bottom 0.813: C5.+ 56.52,10.16 55.25,11.43 R7.2 50.8,18.41 49.53,18.41 R9.2 R10.2 | C5.+ 50.8,7.62 48.9,5.71 SL2.3 | IC2.8 R8.2 57.79,7.62 C5.+
+12V2
  Bottom 0.813: C8.+ 95.88,10.16 94.61,11.43 R13.2 90.17,18.41 88.9,18.41 R15.2 R16.2 | C8.+ 90.17,7.62 88.27,5.71 SL3.3 | IC3.8 R14.2 97.16,7.62 C8.+
+12V3
  Bottom 0.813: C11.+ 135.26,10.16 133.99,11.43 R19.2 129.54,18.41 128.27,18.41 R21.2 R22.2 | C11.+ 129.54,7.62 127.63,5.71 SL4.3 | IC4.8 R20.2 136.53,7.62 C11.+
+12V4
  Bottom 0.813: C14.+ 17.14,40.64 15.88,41.91 R25.2 11.43,48.9 10.16,48.9 R27.2 R28.2 | C14.+ 11.43,38.1 9.53,36.2 SL5.3 | IC5.8 R26.2 18.41,38.1 C14.+
+12V5
  Bottom 0.813: C17.+ 56.52,40.64 55.25,41.91 R31.2 50.8,48.9 49.53,48.9 R33.2 R34.2 | C17.+ 50.8,38.1 48.9,36.2 SL6.3 | IC6.8 R32.2 57.79,38.1 C17.+
+12V6
  Bottom 0.813: C20.+ 95.88,40.64 94.61,41.91 R37.2 90.17,48.9 88.9,48.9 R39.2 R40.2 | C20.+ 90.17,38.1 88.27,36.2 SL7.3 | IC7.8 R38.2 97.16,38.1 C20.+
+12V7
  Bottom 0.813: C23.+ 135.26,40.64 133.99,41.91 R43.2 129.54,48.9 128.27,48.9 R45.2 R46.2 | C23.+ 129.54,38.1 127.63,36.2 SL8.3 | IC8.8 R44.2 136.53,38.1 C23.+
+12V8
  Bottom 0.813: C26.+ 17.14,71.12 15.88,72.39 R49.2 11.43,79.38 10.16,79.38 R51.2 R52.2 | C26.+ 11.43,68.58 9.53,66.67 SL9.3 | IC9.8 R50.2 18.41,68.58 C26.+
+12V9
  Bottom 0.813: C29.+ 56.52,71.12 55.25,72.39 R55.2 50.8,79.38 49.53,79.38 R57.2 R58.2 | C29.+ 50.8,68.58 48.9,66.67 SL10.3 | IC10.8 R56.2 57.79,68.58 C29.+
+12V10
  Bottom 0.813: C32.+ 95.88,71.12 94.61,72.39 R61.2 90.17,79.38 88.9,79.38 R63.2 R64.2 | C32.+ 90.17,68.58 88.27,66.67 SL11.3 | IC11.8 R62.2 97.16,68.58 C32.+
+12V11
  Bottom 0.813: C35.+ 135.26,71.12 133.99,72.39 R67.2 129.54,79.38 128.27,79.38 R69.2 R70.2 | C35.+ 129.54,68.58 127.63,66.67 SL12.3 | IC12.8 R68.2 136.53,68.58 C35.+
+12V12
  Bottom 0.813: C38.+ 17.14,101.6 15.88,102.87 R73.2 11.43,109.85 10.16,109.85 R75.2 R76.2 | C38.+ 11.43,99.06 9.53,97.16 SL13.3 | IC13.8 R74.2 18.41,99.06 C38.+
+12V13
  Bottom 0.813: C41.+ 56.52,101.6 55.25,102.87 R79.2 50.8,109.85 49.53,109.85 R81.2 R82.2 | C41.+ 50.8,99.06 48.9,97.16 SL14.3 | IC14.8 R80.2 57.79,99.06 C41.+
+12V14
  Bottom 0.813: C44.+ 95.88,101.6 94.61,102.87 R85.2 90.17,109.85 88.9,109.85 R87.2 R88.2 | C44.+ 90.17,99.06 88.27,97.16 SL15.3 | IC15.8 R86.2 97.16,99.06 C44.+
+12V15
  Bottom 0.813: C47.+ 135.26,101.6 133.99,102.87 R91.2 129.54,109.85 128.27,109.85 R93.2 R94.2 | C47.+ 129.54,99.06 127.63,97.16 SL16.3 | IC16.8 R92.2 136.53,99.06 C47.+
+12V16
  Bottom 0.813: C50.+ 17.14,132.08 15.88,133.35 R97.2 11.43,140.34 10.16,140.34 R99.2 R100.2 | C50.+ 11.43,129.54 9.53,127.63 SL17.3 | IC17.8 R98.2 18.41,129.54 C50.+
+12V17
  Bottom 0.813: C53.+ 56.52,132.08 55.25,133.35 R103.2 50.8,140.34 49.53,140.34 R105.2 R106.2 | C53.+ 50.8,129.54 48.9,127.63 SL18.3 | IC18.8 R104.2 57.79,129.54 C53.+
+12V18
  Bottom 0.813: C56.+ 95.88,132.08 94.61,133.35 R109.2 90.17,140.34 88.9,140.34 R111.2 R112.2 | C56.+ 90.17,129.54 88.27,127.63 SL19.3 | IC19.8 R110.2 97.16,129.54 C56.+
+12V19
  Bottom 0.813: C59.+ 135.26,132.08 133.99,133.35 R115.2 129.54,140.34 128.27,140.34 R117.2 R118.2 | C59.+ 129.54,129.54 127.63,127.63 SL20.3 | IC20.8 R116.2 136.53,129.54 C59.+
GND
  Bottom 0.813: SL1.4 C2.- 19.05,3.17 24.13,3.17 25.4,4.45 25.4,6.98 C1.2 | C1.2 27.3,11.43 IC1.1 | R2.1 32.38,24.13 LSP2.MP 35.56,20.95 35.56,5.71 33.02,3.17 30.48,3.17 29.21,4.45 29.21,6.98 C1.2
GND1
  Bottom 0.813: SL2.4 C5.- 58.42,3.17 63.5,3.17 64.77,4.45 64.77,6.98 C4.2 | C4.2 66.67,11.43 IC2.1 | R11.1 71.75,24.13 LSP4.MP 74.93,20.95 74.93,5.71 72.39,3.17 69.85,3.17 68.58,4.45 68.58,6.98 C4.2
GND2
  Bottom 0.813: SL3.4 C8.- 97.79,3.17 102.87,3.17 104.14,4.45 104.14,6.98 C7.2 | C7.2 106.05,11.43 IC3.1 | R17.1 111.12,24.13 LSP6.MP 114.3,20.95 114.3,5.71 111.76,3.17 109.22,3.17 107.95,4.45 107.95,6.98 C7.2
GND3
  Bottom 0.813: SL4.4 C11.- 137.16,3.17 142.24,3.17 143.51,4.45 143.51,6.98 C10.2 | C10.2 145.42,11.43 IC4.1 | R23.1 150.5,24.13 LSP8.MP 153.67,20.95 153.67,5.71 151.13,3.17 148.59,3.17 147.32,4.45 147.32,6.98 C10.2
GND4
  Bottom 0.813: SL5.4 C14.- 19.05,33.66 24.13,33.66 25.4,34.93 25.4,37.47 C13.2 | C13.2 27.3,41.91 IC5.1 | R29.1 32.38,54.61 LSP10.MP 35.56,51.44 35.56,36.2 33.02,33.66 30.48,33.66 29.21,34.93 29.21,37.47 C13.2
GND5
  Bottom 0.813: SL6.4 C17.- 58.42,33.66 63.5,33.66 64.77,34.93 64.77,37.47 C16.2 | C16.2 66.67,41.91 IC6.1 | R35.1 71.75,54.61 LSP12.MP 74.93,51.44 74.93,36.2 72.39,33.66 69.85,33.66 68.58,34.93 68.58,37.47 C16.2
GND6
  Bottom 0.813: SL7.4 C20.- 97.79,33.66 102.87,33.66 104.14,34.93 104.14,37.47 C19.2 | C19.2 106.05,41.91 IC7.1 | R41.1 111.12,54.61 LSP14.MP 114.3,51.44 114.3,36.2 111.76,33.66 109.22,33.66 107.95,34.93 107.95,37.47 C19.2
GND7
  Bottom 0.813: SL8.4 C23.- 137.16,33.66 142.24,33.66 143.51,34.93 143.51,37.47 C22.2 | C22.2 145.42,41.91 IC8.1 | R47.1 150.5,54.61 LSP16.MP 153.67,51.44 153.67,36.2 151.13,33.66 148.59,33.66 147.32,34.93 147.32,37.47 C22.2
GND8
  Bottom 0.813: SL9.4 C26.- 19.05,64.14 24.13,64.14 25.4,65.41 25.4,67.94 C25.2 | C25.2 27.3,72.39 IC9.1 | R53.1 32.38,85.09 LSP18.MP 35.56,81.91 35.56,66.67 33.02,64.14 30.48,64.14 29.21,65.41 29.21,67.94 C25.2
GND9
  Bottom 0.813: SL10.4 C29.- 58.42,64.14 63.5,64.14 64.77,65.41 64.77,67.94 C28.2 | C28.2 66.67,72.39 IC10.1 | R59.1 71.75,85.09 LSP20.MP 74.93,81.91 74.93,66.67 72.39,64.14 69.85,64.14 68.58,65.41 68.58,67.94 C28.2
GND10
  Bottom 0.813: SL11.4 C32.- 97.79,64.14 102.87,64.14 104.14,65.41 104.14,67.94 C31.2 | C31.2 106.05,72.39 IC11.1 | R65.1 111.12,85.09 LSP22.MP 114.3,81.91 114.3,66.67 111.76,64.14 109.22,64.14 107.95,65.41 107.95,67.94 C31.2
GND11
  Bottom 0.813: SL12.4 C35.- 137.16,64.14 142.24,64.14 143.51,65.41 143.51,67.94 C34.2 | C34.2 145.42,72.39 IC12.1 | R71.1 150.5,85.09 LSP24.MP 153.67,81.91 153.67,66.67 151.13,64.14 148.59,64.14 147.32,65.41 147.32,67.94 C34.2
GND12
  Bottom 0.813: SL13.4 C38.- 19.05,94.61 24.13,94.61 25.4,95.88 25.4,98.42 C37.2 | C37.2 27.3,102.87 IC13.1 | R77.1 32.38,115.57 LSP26.MP 35.56,112.39 35.56,97.16 33.02,94.61 30.48,94.61 29.21,95.88 29.21,98.42 C37.2
GND13
  Bottom 0.813: SL14.4 C41.- 58.42,94.61 63.5,94.61 64.77,95.88 64.77,98.42 C40.2 | C40.2 66.67,102.87 IC14.1 | R83.1 71.75,115.57 LSP28.MP 74.93,112.39 74.93,97.16 72.39,94.61 69.85,94.61 68.58,95.88 68.58,98.42 C40.2
GND14
  Bottom 0.813: SL15.4 C44.- 97.79,94.61 102.87,94.61 104.14,95.88 104.14,98.42 C43.2 | C43.2 106.05,102.87 IC15.1 | R89.1 111.12,115.57 LSP30.MP 114.3,112.39 114.3,97.16 111.76,94.61 109.22,94.61 107.95,95.88 107.95,98.42 C43.2
GND15
  Bottom 0.813: SL16.4 C47.- 137.16,94.61 142.24,94.61 143.51,95.88 143.51,98.42 C46.2 | C46.2 145.42,102.87 IC16.1 | R95.1 150.5,115.57 LSP32.MP 153.67,112.39 153.67,97.16 151.13,94.61 148.59,94.61 147.32,95.88 147.32,98.42 C46.2
GND16
  Bottom 0.813: SL17.4 C50.- 19.05,125.09 24.13,125.09 25.4,126.36 25.4,128.91 C49.2 | C49.2 27.3,133.35 IC17.1 | R101.1 32.38,146.05 LSP34.MP 35.56,142.88 35.56,127.63 33.02,125.09 30.48,125.09 29.21,126.36 29.21,128.91 C49.2
GND17
  Bottom 0.813: SL18.4 C53.- 58.42,125.09 63.5,125.09 64.77,126.36 64.77,128.91 C52.2 | C52.2 66.67,133.35 IC18.1 | R107.1 71.75,146.05 LSP36.MP 74.93,142.88 74.93,127.63 72.39,125.09 69.85,125.09 68.58,126.36 68.58,128.91 C52.2
GND18
  Bottom 0.813: SL19.4 C56.- 97.79,125.09 102.87,125.09 104.14,126.36 104.14,128.91 C55.2 | C55.2 106.05,133.35 IC19.1 | R113.1 111.12,146.05 LSP38.MP 114.3,142.88 114.3,127.63 111.76,125.09 109.22,125.09 107.95,126.36 107.95,128.91 C55.2
GND19
  Bottom 0.813: SL20.4 C59.- 137.16,125.09 142.24,125.09 143.51,126.36 143.51,128.91 C58.2 | C58.2 145.42,133.35 IC20.1 | R119.1 150.5,146.05 LSP40.MP 153.67,142.88 153.67,127.63 151.13,125.09 148.59,125.09 147.32,126.36 147.32,128.91 C58.2
N$1
  Bottom 0.813: IC1.6 24.77,16.51 IC1.2 C1.1 R6.1
N$2
  Bottom 0.813: IC1.5 R2.2 20.95,25.4 D3.C R1.1
N$3
  Bottom 0.813: C3.- LSP1.MP
N$4
  Bottom 0.813: IC1.4 24.13,27.3 20.32,27.3 19.68,26.67 R5.1
N$5
  Bottom 0.813: LED1.A R3.1 D1.A
N$6
  Bottom 0.813: SL1.2 6.98,6.35 LED1.K
N$7
  Bottom 0.813: D2.A R4.1 LED2.A
N$8
  Bottom 0.813: R6.2 31.11,6.35 C3.+ 31.11,11.43 31.75,12.06 31.75,17.14 IC1.3
N$9
  Bottom 0.813: D2.C D1.C 15.24,20.95 17.78,20.95 IC1.7 D3.A
N$10
  Bottom 0.813: R12.2 70.48,6.35 C6.+ 70.48,11.43 71.12,12.06 71.12,17.14 IC2.3
N$11
  Bottom 0.813: SL1.1 LED2.K
N$12
  Bottom 0.813: SL2.2 46.36,6.35 LED3.K
N$13
  Bottom 0.813: SL2.1 LED4.K
N$14
  Bottom 0.813: IC2.6 64.14,16.51 IC2.2 C4.1 R12.1
N$15
  Bottom 0.813: LED3.A R8.1 D4.A
N$16
  Bottom 0.813: D5.A R9.1 LED4.A
N$17
  Bottom 0.813: IC2.4 63.5,27.3 59.69,27.3 59.05,26.67 R10.1
N$18
  Bottom 0.813: IC2.5 R11.2 60.33,25.4 D6.C R7.1
N$19
  Bottom 0.813: D5.C D4.C 54.61,20.95 57.15,20.95 IC2.7 D6.A
N$20
  Bottom 0.813: C6.- LSP3.MP
N$21
  Bottom 0.813: R18.2 109.85,6.35 C9.+ 109.85,11.43 110.49,12.06 110.49,17.14 IC3.3
N$22
  Bottom 0.813: SL3.2 85.72,6.35 LED5.K
N$23
  Bottom 0.813: SL3.1 LED6.K
N$24
  Bottom 0.813: IC3.6 103.5,16.51 IC3.2 C7.1 R18.1
N$25
  Bottom 0.813: LED5.A R14.1 D7.A
N$26
  Bottom 0.813: D8.A R15.1 LED6.A
N$27
  Bottom 0.813: IC3.4 102.87,27.3 99.06,27.3 98.42,26.67 R16.1
N$28
  Bottom 0.813: IC3.5 R17.2 99.69,25.4 D9.C R13.1
N$29
  Bottom 0.813: D8.C D7.C 93.98,20.95 96.52,20.95 IC3.7 D9.A
N$30
  Bottom 0.813: C9.- LSP5.MP
N$31
  Bottom 0.813: R24.2 149.23,6.35 C12.+ 149.23,11.43 149.86,12.06 149.86,17.14 IC4.3
N$32
  Bottom 0.813: SL4.2 125.09,6.35 LED7.K
N$33
  Bottom 0.813: SL4.1 LED8.K
N$34
  Bottom 0.813: IC4.6 142.88,16.51 IC4.2 C10.1 R24.1
N$35
  Bottom 0.813: LED7.A R20.1 D10.A
N$36
  Bottom 0.813: D11.A R21.1 LED8.A
N$37
  Bottom 0.813: IC4.4 142.24,27.3 138.43,27.3 137.8,26.67 R22.1
N$38
  Bottom 0.813: IC4.5 R23.2 139.06,25.4 D12.C R19.1
N$39
  Bottom 0.813: D11.C D10.C 133.35,20.95 135.89,20.95 IC4.7 D12.A
N$40
  Bottom 0.813: C12.- LSP7.MP
N$41
  Bottom 0.813: R30.2 31.11,36.83 C15.+ 31.11,41.91 31.75,42.55 31.75,47.62 IC5.3
N$42
  Bottom 0.813: SL5.2 6.98,36.83 LED9.K
N$43
  Bottom 0.813: SL5.1 LED10.K
N$44
  Bottom 0.813: IC5.6 24.77,46.99 IC5.2 C13.1 R30.1
N$45
  Bottom 0.813: LED9.A R26.1 D13.A
N$46
  Bottom 0.813: D14.A R27.1 LED10.A
N$47
  Bottom 0.813: IC5.4 24.13,57.79 20.32,57.79 19.68,57.15 R28.1
N$48
  Bottom 0.813: IC5.5 R29.2 20.95,55.88 D15.C R25.1
N$49
  Bottom 0.813: D14.C D13.C 15.24,51.44 17.78,51.44 IC5.7 D15.A
N$50
  Bottom 0.813: C15.- LSP9.MP
N$51
  Bottom 0.813: R36.2 70.48,36.83 C18.+ 70.48,41.91 71.12,42.55 71.12,47.62 IC6.3
N$52
  Bottom 0.813: SL6.2 46.36,36.83 LED11.K
N$53
  Bottom 0.813: SL6.1 LED12.K
N$54
  Bottom 0.813: IC6.6 64.14,46.99 IC6.2 C16.1 R36.1
N$55
  Bottom 0.813: LED11.A R32.1 D16.A
N$56
  Bottom 0.813: D17.A R33.1 LED12.A
N$57
  Bottom 0.813: IC6.4 63.5,57.79 59.69,57.79 59.05,57.15 R34.1
N$58
  Bottom 0.813: IC6.5 R35.2 60.33,55.88 D18.C R31.1
N$59
  Bottom 0.813: D17.C D16.C 54.61,51.44 57.15,51.44 IC6.7 D18.A
N$60
  Bottom 0.813: C18.- LSP11.MP
N$61
  Bottom 0.813: R42.2 109.85,36.83 C21.+ 109.85,41.91 110.49,42.55 110.49,47.62 IC7.3
N$62
  Bottom 0.813: SL7.2 85.72,36.83 LED13.K
N$63
  Bottom 0.813: SL7.1 LED14.K
N$64
  Bottom 0.813: IC7.6 103.5,46.99 IC7.2 C19.1 R42.1
N$65
  Bottom 0.813: LED13.A R38.1 D19.A
N$66
  Bottom 0.813: D20.A R39.1 LED14.A
N$67
  Bottom 0.813: IC7.4 102.87,57.79 99.06,57.79 98.42,57.15 R40.1
N$68
  Bottom 0.813: IC7.5 R41.2 99.69,55.88 D21.C R37.1
N$69
  Bottom 0.813: D20.C D19.C 93.98,51.44 96.52,51.44 IC7.7 D21.A
N$70
  Bottom 0.813: C21.- LSP13.MP
N$71
  Bottom 0.813: R48.2 149.23,36.83 C24.+ 149.23,41.91 149.86,42.55 149.86,47.62 IC8.3
N$72
  Bottom 0.813: SL8.2 125.09,36.83 LED15.K
N$73
  Bottom 0.813: SL8.1 LED16.K
N$74
  Bottom 0.813: IC8.6 142.88,46.99 IC8.2 C22.1 R48.1
N$75
  Bottom 0.813: LED15.A R44.1 D22.A
N$76
  Bottom 0.813: D23.A R45.1 LED16.A
N$77
  Bottom 0.813: IC8.4 142.24,57.79 138.43,57.79 137.8,57.15 R46.1
N$78
  Bottom 0.813: IC8.5 R47.2 139.06,55.88 D24.C R43.1
N$79
  Bottom 0.813: D23.C D22.C 133.35,51.44 135.89,51.44 IC8.7 D24.A
N$80
  Bottom 0.813: C24.- LSP15.MP
N$81
  Bottom 0.813: R54.2 31.11,67.31 C27.+ 31.11,72.39 31.75,73.02 31.75,78.1 IC9.3
N$82
  Bottom 0.813: SL9.2 6.98,67.31 LED17.K
N$83
  Bottom 0.813: SL9.1 LED18.K
N$84
  Bottom 0.813: IC9.6 24.77,77.47 IC9.2 C25.1 R54.1
N$85
  Bottom 0.813: LED17.A R50.1 D25.A
N$86
  Bottom 0.813: D26.A R51.1 LED18.A
N$87
  Bottom 0.813: IC9.4 24.13,88.27 20.32,88.27 19.68,87.63 R52.1
N$88
  Bottom 0.813: IC9.5 R53.2 20.95,86.36 D27.C R49.1
N$89
  Bottom 0.813: D26.C D25.C 15.24,81.91 17.78,81.91 IC9.7 D27.A
N$90
  Bottom 0.813: C27.- LSP17.MP
N$91
  Bottom 0.813: R60.2 70.48,67.31 C30.+ 70.48,72.39 71.12,73.02 71.12,78.1 IC10.3
N$92
  Bottom 0.813: SL10.2 46.36,67.31 LED19.K
N$93
  Bottom 0.813: SL10.1 LED20.K
N$94
  Bottom 0.813: IC10.6 64.14,77.47 IC10.2 C28.1 R60.1
N$95
  Bottom 0.813: LED19.A R56.1 D28.A
N$96
  Bottom 0.813: D29.A R57.1 LED20.A
N$97
  Bottom 0.813: IC10.4 63.5,88.27 59.69,88.27 59.05,87.63 R58.1
N$98
  Bottom 0.813: IC10.5 R59.2 60.33,86.36 D30.C R55.1
N$99
  Bottom 0.813: D29.C D28.C 54.61,81.91 57.15,81.91 IC10.7 D30.A
N$100
  Bottom 0.813: C30.- LSP19.MP
N$101
  Bottom 0.813: R66.2 109.85,67.31 C33.+ 109.85,72.39 110.49,73.02 110.49,78.1 IC11.3
N$102
  Bottom 0.813: SL11.2 85.72,67.31 LED21.K
N$103
  Bottom 0.813: SL11.1 LED22.K
N$104
  Bottom 0.813: IC11.6 103.5,77.47 IC11.2 C31.1 R66.1
N$105
  Bottom 0.813: LED21.A R62.1 D31.A
N$106
  Bottom 0.813: D32.A R63.1 LED22.A
N$107
  Bottom 0.813: IC11.4 102.87,88.27 99.06,88.27 98.42,87.63 R64.1
N$108
  Bottom 0.813: IC11.5 R65.2 99.69,86.36 D33.C R61.1
N$109
  Bottom 0.813: D32.C D31.C 93.98,81.91 96.52,81.91 IC11.7 D33.A
N$110
  Bottom 0.813: C33.- LSP21.MP
N$111
  Bottom 0.813: R72.2 149.23,67.31 C36.+ 149.23,72.39 149.86,73.02 149.86,78.1 IC12.3
N$112
  Bottom 0.813: SL12.2 125.09,67.31 LED23.K
N$113
  Bottom 0.813: SL12.1 LED24.K
N$114
  Bottom 0.813: IC12.6 142.88,77.47 IC12.2 C34.1 R72.1
N$115
  Bottom 0.813: LED23.A R68.1 D34.A
N$116
  Bottom 0.813: D35.A R69.1 LED24.A
N$117
  Bottom 0.813: IC12.4 142.24,88.27 138.43,88.27 137.8,87.63 R70.1
N$118
  Bottom 0.813: IC12.5 R71.2 139.06,86.36 D36.C R67.1
N$119
  Bottom 0.813: D35.C D34.C 133.35,81.91 135.89,81.91 IC12.7 D36.A
N$120
  Bottom 0.813: C36.- LSP23.MP
N$121
  Bottom 0.813: R78.2 31.11,97.79 C39.+ 31.11,102.87 31.75,103.5 31.75,108.58 IC13.3
N$122
  Bottom 0.813: SL13.2 6.98,97.79 LED25.K
N$123
  Bottom 0.813: SL13.1 LED26.K
N$124
  Bottom 0.813: IC13.6 24.77,107.95 IC13.2 C37.1 R78.1
N$125
  Bottom 0.813: LED25.A R74.1 D37.A
N$126
  Bottom 0.813: D38.A R75.1 LED26.A
N$127
  Bottom 0.813: IC13.4 24.13,118.74 20.32,118.74 19.68,118.11 R76.1
N$128
  Bottom 0.813: IC13.5 R77.2 20.95,116.84 D39.C R73.1
N$129
  Bottom 0.813: D38.C D37.C 15.24,112.39 17.78,112.39 IC13.7 D39.A
N$130
  Bottom 0.813: C39.- LSP25.MP
N$131
  Bottom 0.813: R84.2 70.48,97.79 C42.+ 70.48,102.87 71.12,103.5 71.12,108.58 IC14.3
N$132
  Bottom 0.813: SL14.2 46.36,97.79 LED27.K
N$133
  Bottom 0.813: SL14.1 LED28.K
N$134
  Bottom 0.813: IC14.6 64.14,107.95 IC14.2 C40.1 R84.1
N$135
  Bottom 0.813: LED27.A R80.1 D40.A
N$136
  Bottom 0.813: D41.A R81.1 LED28.A
N$137
  Bottom 0.813: IC14.4 63.5,118.74 59.69,118.74 59.05,118.11 R82.1
N$138
  Bottom 0.813: IC14.5 R83.2 60.33,116.84 D42.C R79.1
N$139
  Bottom 0.813: D41.C D40.C 54.61,112.39 57.15,112.39 IC14.7 D42.A
N$140
  Bottom 0.813: C42.- LSP27.MP
N$141
  Bottom 0.813: R90.2 109.85,97.79 C45.+ 109.85,102.87 110.49,103.5 110.49,108.58 IC15.3
N$142
  Bottom 0.813: SL15.2 85.72,97.79 LED29.K
N$143
  Bottom 0.813: SL15.1 LED30.K
N$144
  Bottom 0.813: IC15.6 103.5,107.95 IC15.2 C43.1 R90.1
N$145
  Bottom 0.813: LED29.A R86.1 D43.A
N$146
  Bottom 0.813: D44.A R87.1 LED30.A
N$147
  Bottom 0.813: IC15.4 102.87,118.74 99.06,118.74 98.42,118.11 R88.1
N$148
  Bottom 0.813: IC15.5 R89.2 99.69,116.84 D45.C R85.1
N$149
  Bottom 0.813: D44.C D43.C 93.98,112.39 96.52,112.39 IC15.7 D45.A
N$150
  Bottom 0.813: C45.- LSP29.MP
N$151
  Bottom 0.813: R96.2 149.23,97.79 C48.+ 149.23,102.87 149.86,103.5 149.86,108.58 IC16.3
N$152
  Bottom 0.813: SL16.2 125.09,97.79 LED31.K
N$153
  Bottom 0.813: SL16.1 LED32.K
N$154
  Bottom 0.813: IC16.6 142.88,107.95 IC16.2 C46.1 R96.1
N$155
  Bottom 0.813: LED31.A R92.1 D46.A
N$156
  Bottom 0.813: D47.A R93.1 LED32.A
N$157
  Bottom 0.813: IC16.4 142.24,118.74 138.43,118.74 137.8,118.11 R94.1
N$158
  Bottom 0.813: IC16.5 R95.2 139.06,116.84 D48.C R91.1
N$159
  Bottom 0.813: D47.C D46.C 133.35,112.39 135.89,112.39 IC16.7 D48.A
N$160
  Bottom 0.813: C48.- LSP31.MP
N$161
  Bottom 0.813: R102.2 31.11,128.27 C51.+ 31.11,133.35 31.75,133.99 31.75,139.06 IC17.3
N$162
  Bottom 0.813: SL17.2 6.98,128.27 LED33.K
N$163
  Bottom 0.813: SL17.1 LED34.K
N$164
  Bottom 0.813: IC17.6 24.77,138.43 IC17.2 C49.1 R102.1
N$165
  Bottom 0.813: LED33.A R98.1 D49.A
N$166
  Bottom 0.813: D50.A R99.1 LED34.A
N$167
  Bottom 0.813: IC17.4 24.13,149.23 20.32,149.23 19.68,148.59 R100.1
N$168
  Bottom 0.813: IC17.5 R101.2 20.95,147.32 D51.C R97.1
N$169
  Bottom 0.813: D50.C D49.C 15.24,142.88 17.78,142.88 IC17.7 D51.A
N$170
  Bottom 0.813: C51.- LSP33.MP
N$171
  Bottom 0.813: R108.2 70.48,128.27 C54.+ 70.48,133.35 71.12,133.99 71.12,139.06 IC18.3
N$172
  Bottom 0.813: SL18.2 46.36,128.27 LED35.K
N$173
  Bottom 0.813: SL18.1 LED36.K
N$174
  Bottom 0.813: IC18.6 64.14,138.43 IC18.2 C52.1 R108.1
N$175
  Bottom 0.813: LED35.A R104.1 D52.A
N$176
  Bottom 0.813: D53.A R105.1 LED36.A
N$177
  Bottom 0.813: IC18.4 63.5,149.23 59.69,149.23 59.05,148.59 R106.1
N$178
  Bottom 0.813: IC18.5 R107.2 60.33,147.32 D54.C R103.1
N$179
  Bottom 0.813: D53.C D52.C 54.61,142.88 57.15,142.88 IC18.7 D54.A
N$180
  Bottom 0.813: C54.- LSP35.MP
N$181
  Bottom 0.813: R114.2 109.85,128.27 C57.+ 109.85,133.35 110.49,133.99 110.49,139.06 IC19.3
N$182
  Bottom 0.813: SL19.2 85.72,128.27 LED37.K
N$183
  Bottom 0.813: SL19.1 LED38.K
N$184
  Bottom 0.813: IC19.6 103.5,138.43 IC19.2 C55.1 R114.1
N$185
  Bottom 0.813: LED37.A R110.1 D55.A
N$186
  Bottom 0.813: D56.A R111.1 LED38.A
N$187
  Bottom 0.813: IC19.4 102.87,149.23 99.06,149.23 98.42,148.59 R112.1
N$188
  Bottom 0.813: IC19.5 R113.2 99.69,147.32 D57.C R109.1
N$189
  Bottom 0.813: D56.C D55.C 93.98,142.88 96.52,142.88 IC19.7 D57.A
N$190
  Bottom 0.813: C57.- LSP37.MP
N$191
  Bottom 0.813: R120.2 149.23,128.27 C60.+ 149.23,133.35 149.86,133.99 149.86,139.06 IC20.3
N$192
  Bottom 0.813: SL20.2 125.09,128.27 LED39.K
N$193
  Bottom 0.813: SL20.1 LED40.K
N$194
  Bottom 0.813: IC20.6 142.88,138.43 IC20.2 C58.1 R120.1
N$195
  Bottom 0.813: LED39.A R116.1 D58.A
N$196
  Bottom 0.813: D59.A R117.1 LED40.A
N$197
  Bottom 0.813: IC20.4 142.24,149.23 138.43,149.23 137.8,148.59 R118.1
N$198
  Bottom 0.813: IC20.5 R119.2 139.06,147.32 D60.C R115.1
N$199
  Bottom 0.813: D59.C D58.C 133.35,142.88 135.89,142.88 IC20.7 D60.A
N$200
  Bottom 0.813: C60.- LSP39.MP
S$1
  Bottom 0.254: 1.27,1.27 1.27,29.21 38.1,29.21 38.1,1.27 1.27,1.27
S$2
  Bottom 0.254: 40.64,1.27 40.64,29.21 77.47,29.21 77.47,1.27 40.64,1.27
S$3
  Bottom 0.254: 80.01,1.27 80.01,29.21 116.84,29.21 116.84,1.27 80.01,1.27
S$4
  Bottom 0.254: 119.38,1.27 119.38,29.21 156.21,29.21 156.21,1.27 119.38,1.27
S$5
  Bottom 0.254: 1.27,31.75 1.27,59.69 38.1,59.69 38.1,31.75 1.27,31.75
S$6
  Bottom 0.254: 40.64,31.75 40.64,59.69 77.47,59.69 77.47,31.75 40.64,31.75
S$7
  Bottom 0.254: 80.01,31.75 80.01,59.69 116.84,59.69 116.84,31.75 80.01,31.75
S$8
  Bottom 0.254: 119.38,31.75 119.38,59.69 156.21,59.69 156.21,31.75 119.38,31.75
S$9
  Bottom 0.254: 1.27,62.23 1.27,90.17 38.1,90.17 38.1,62.23 1.27,62.23
S$10
  Bottom 0.254: 40.64,62.23 40.64,90.17 77.47,90.17 77.47,62.23 40.64,62.23
S$11
  Bottom 0.254: 80.01,62.23 80.01,90.17 116.84,90.17 116.84,62.23 80.01,62.23
S$12
  Bottom 0.254: 119.38,62.23 119.38,90.17 156.21,90.17 156.21,62.23 119.38,62.23
S$13
  Bottom 0.254: 1.27,92.71 1.27,120.65 38.1,120.65 38.1,92.71 1.27,92.71
S$14
  Bottom 0.254: 40.64,92.71 40.64,120.65 77.47,120.65 77.47,92.71 40.64,92.71
S$15
  Bottom 0.254: 80.01,92.71 80.01,120.65 116.84,120.65 116.84,92.71 80.01,92.71
S$16
  Bottom 0.254: 119.38,92.71 119.38,120.65 156.21,120.65 156.21,92.71 119.38,92.71
S$17
  Bottom 0.254: 1.27,123.19 1.27,151.13 38.1,151.13 38.1,123.19 1.27,123.19
S$18
  Bottom 0.254: 40.64,123.19 40.64,151.13 77.47,151.13 77.47,123.19 40.64,123.19
S$19
  Bottom 0.254: 80.01,123.19 80.01,151.13 116.84,151.13 116.84,123.19 80.01,123.19
S$20
  Bottom 0.254: 119.38,123.19 119.38,151.13 156.21,151.13 156.21,123.19 119.38,123.19

## Text on the board
_tNames: R5 | R5 | R5 | R5 | R2 | LSP2 | R2 | LSP2 | R2 | LSP2 | R2 | LSP2 | R1 | R1 | R1 | R1 | D2 | D1 | D3 | D2 | D1 | D3 | D2 | D1 | D3 | D2 | D1 | D3 | LSP1 | LSP1 | LSP1 | LSP1 | R4 | R4 | R4 | R4 | R3 | R3 | R3 | R3 | IC1 | IC1 | IC1 | IC1 | C1 | C1 | C1 | C1 | C3 | C3 | C3 | C3 | SL1 | LED2 | LED1 | SL1 | LED2 | LED1 | SL1 | LED2 | LED1 | SL1 | LED2 | LED1 | R6 | R6 | R6 | R6 | C2 | C2 | C2 | C2 | R5 | R5 | R5 | R5 | R2 | LSP2 | R2 | LSP2 | R2 | LSP2 | R2 | LSP2 | R1 | R1 | R1 | R1 | D2 | D1 | D3 | D2 | D1 | D3 | D2 | D1 | D3 | D2 | D1 | D3 | LSP1 | LSP1 | LSP1 | LSP1 | R4 | R4 | R4 | R4 | R3 | IC1 | R3 | IC1 | R3 | IC1 | R3 | IC1 | C1 | C3 | C1 | C3 | C1 | C3 | C1 | C3 | SL1 | LED2 | LED1 | SL1 | LED2 | LED1 | SL1 | LED2 | LED1 | SL1 | LED2 | LED1 | R6 | R6 | R6 | R6 | C2 | C2 | C2 | C2 | R5 | R5 | R5 | R5 | R2 | LSP2 | R2 | LSP2 | R2 | LSP2 | R2 | LSP2 | R1 | R1 | R1 | R1 | D2 | D1 | D3 | D2 | D1 | D3 | D2 | D1 | D3 | D2 | D1 | D3 | LSP1 | LSP1 | LSP1 | LSP1 | R4 | R4 | R4 | R4 | R3 | R3 | R3 | R3 | IC1 | IC1 | IC1 | IC1 | C1 | C1 | C1 | C1 | C3 | C3 | C3 | C3 | SL1 | LED2 | LED1 | SL1 | LED2 | LED1 | SL1 | LED2 | LED1 | SL1 | LED2 | LED1 | R6 | R6 | R6 | R6 | C2 | C2 | C2 | C2 | R5 | R5 | R5 | R5 | R2 | LSP2 | R2 | LSP2 | R2 | LSP2 | R2 | LSP2 | R1 | R1 | R1 | R1 | D2 | D1 | D3 | D2 | D1 | D3 | D2 | D1 | D3 | D2 | D1 | D3 | LSP1 | LSP1 | LSP1 | LSP1 | R4 | R4 | R4 | R4 | R3 | IC1 | R3 | IC1 | R3 | IC1 | R3 | IC1 | C1 | C3 | C1 | C3 | C1 | C3 | C1 | C3 | SL1 | LED2 | LED1 | SL1 | LED2 | LED1 | SL1 | LED2 | LED1 | SL1 | LED2 | LED1 | R6 | R6 | R6 | R6 | C2 | C2 | C2 | C2 | R5 | R5 | R5 | R5 | R2 | LSP2 | R2 | LSP2 | R2 | LSP2 | R2 | LSP2 | R1 | R1 | R1 | R1 | D2 | D1 | D3 | D2 | D1 | D3 | D2 | D1 | D3 | D2 | D1 | D3 | LSP1 | LSP1 | LSP1 | LSP1 | R4 | R4 | R4 | R4 | R3 | R3 | R3 | R3 | IC1 | IC1 | IC1 | IC1 | C1 | C1 | C1 | C1 | C3 | C3 | C3 | C3 | SL1 | LED2 | LED1 | SL1 | LED2 | LED1 | SL1 | LED2 | LED1 | SL1 | LED2 | LED1 | R6 | R6 | R6 | R6 | C2 | C2 | C2 | C2
DrillLegend: LAYER-STACK
DrillLegend_01-16: 01-16